# Altium PCB Test_project.PcbDoc
Units mil, origin at the board's own origin, x right, y up, seen from the top; angles counter-clockwise.
Board outline 1580 x 1930 mil, 2 copper layers (Top Layer, Bottom Layer), stack 61.756 mil thick; 15 components, 12 nets, 45 pads, 1 vias.
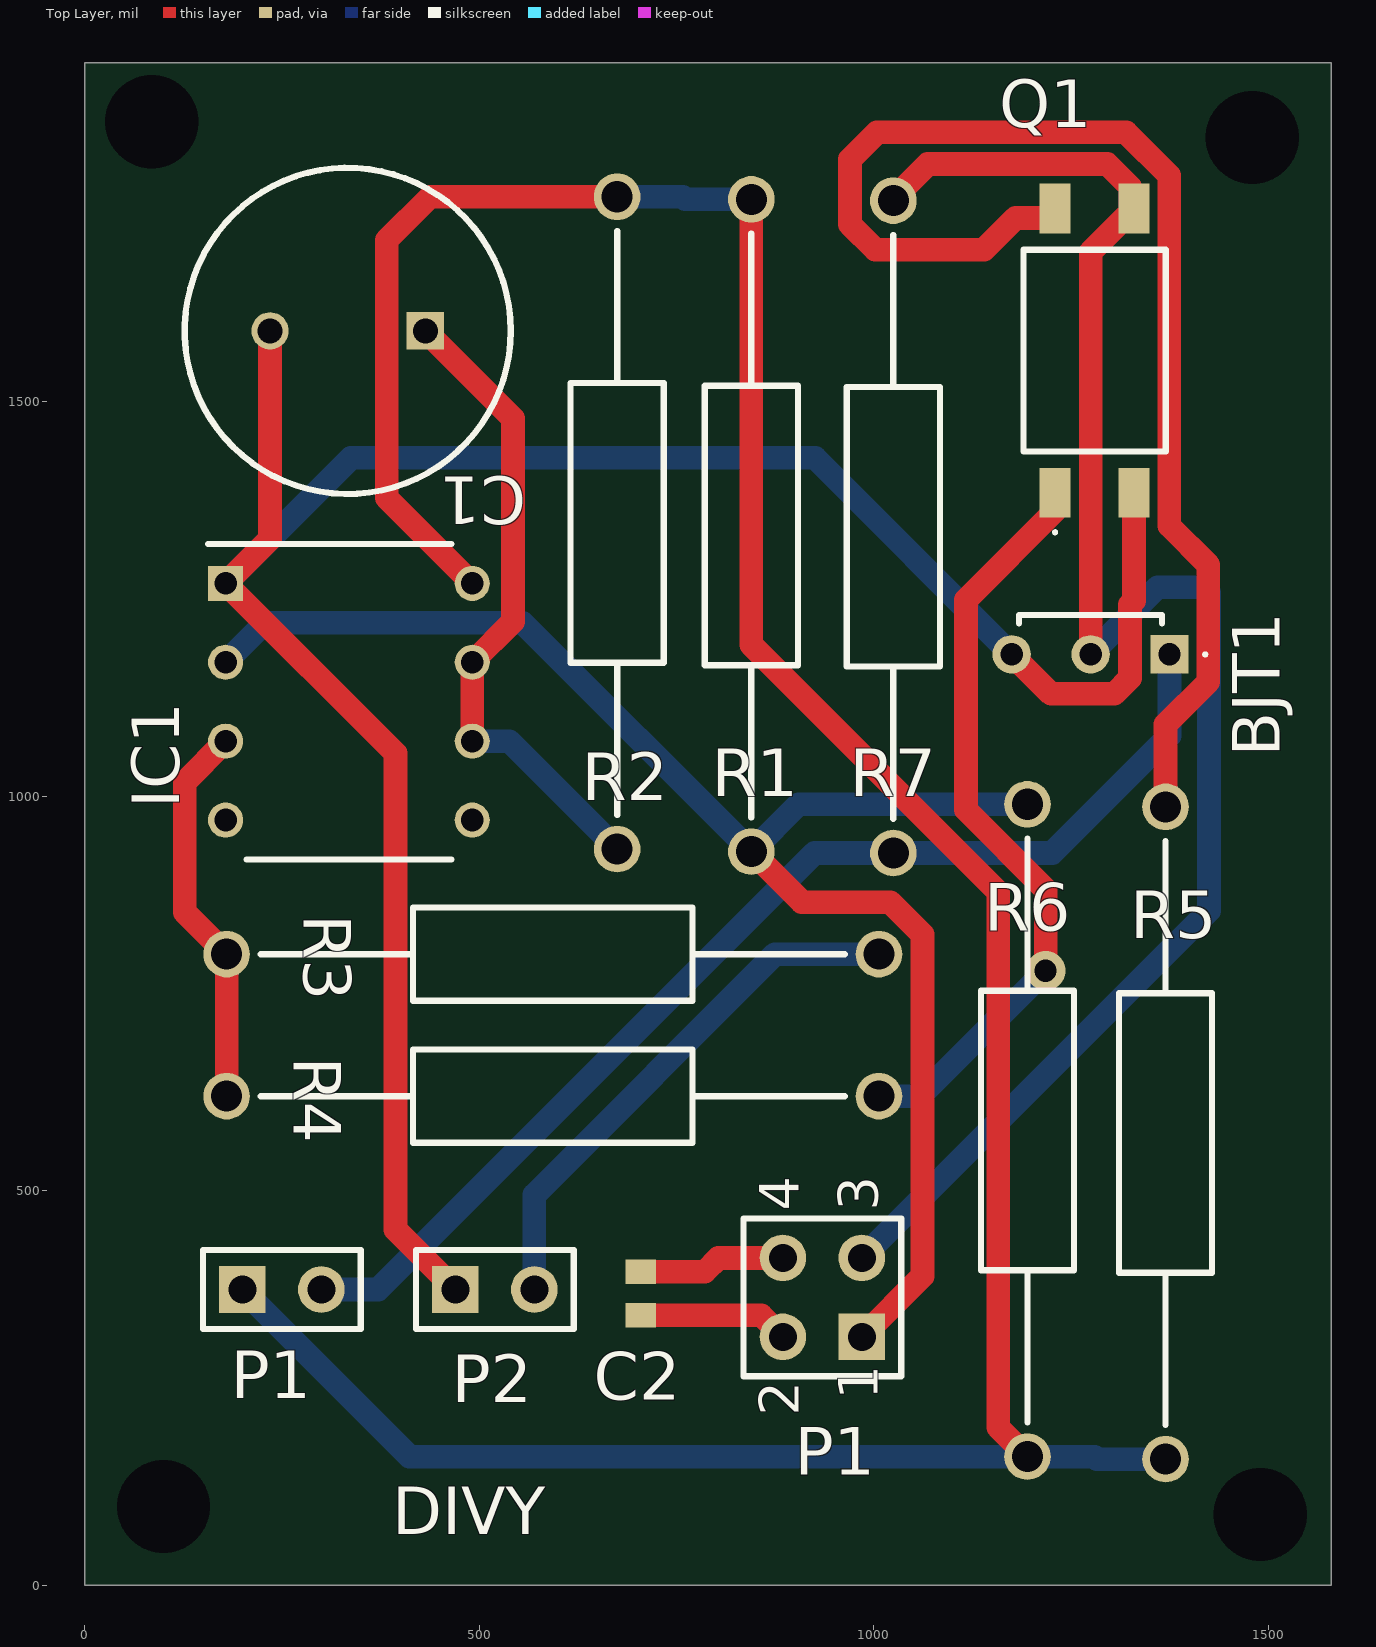
[diagram p0: Top Layer view]
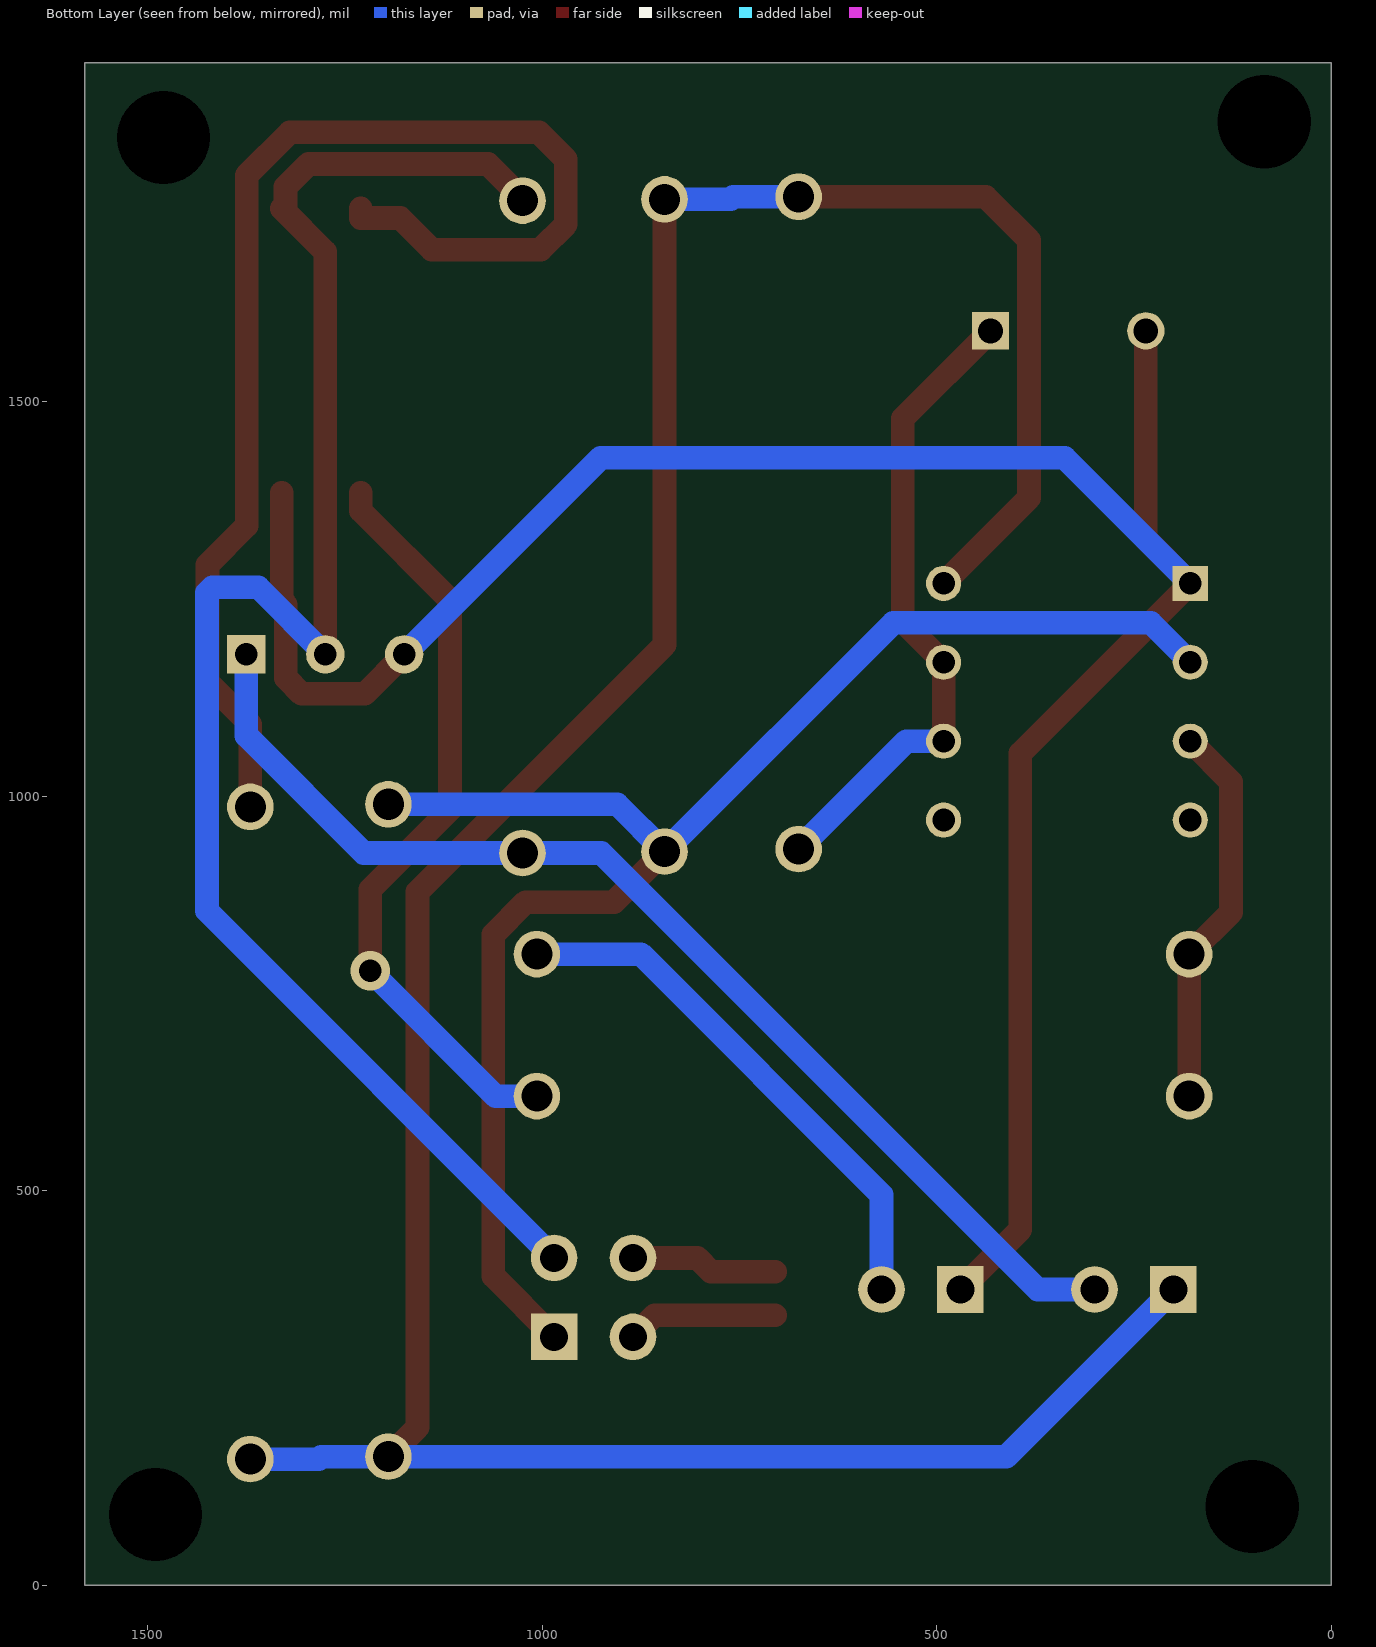
[diagram p1: Bottom Layer view, seen from below]
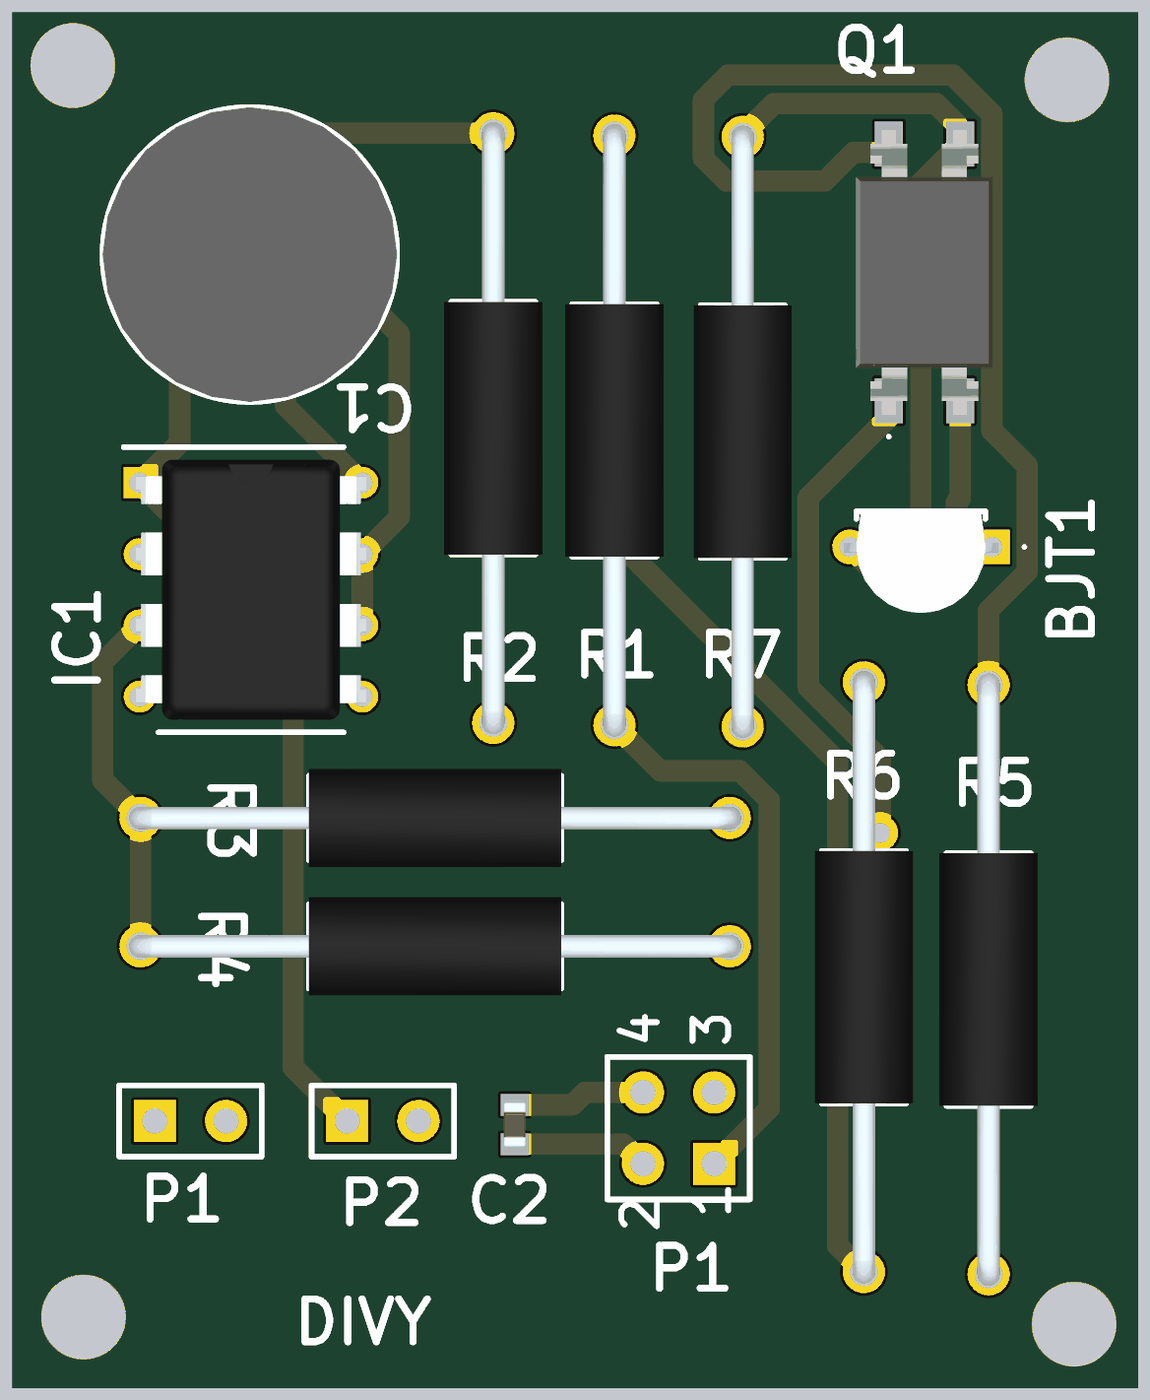
[diagram p2: 3D render of the assembled board from above, using the file's embedded part models]

## Layer stack, top to bottom
Top Solder: solder mask 1, SM-001, Dk 4
Top Layer: signal copper 1.378
Dielectric 1: core 59, Core-043, Dk 4.3
Bottom Layer: signal copper 1.378
Bottom Solder: solder mask 1, SM-001, Dk 4

## Board outline
0,0 0,1930 1580,1930 1580,0

## Design rules (kind name [scope] priority, off if disabled: settings)
Clearance [All] p1: gap=10 ignorepadtopadclearanceinfootprint=FALSE
PolygonConnect [All] p1: connectstyle=Relief reliefconductorwidth=10 reliefentries=4 polygonreliefangle="90 Angle" airgapwidth=10
RoutingVias [All] p1: holewidth=28 width=50 viastyle="Through Hole" minholewidth=28 minwidth=50 maxholewidth=28 maxwidth=50
SolderMaskExpansion [All] p1: expansion=4 istentingtop=FALSE
Width [All] p1: maxlimit=50 minlimit=10 preferedwidth=30
30 further rules are at their usual default settings.

## Components (designator, comment, footprint, x,y, rotation, side; value= is the part's Value field where it differs from the comment)
BJT1 "2N2222A" 2N2222A 1375,1180 r180 top
C1 "MAL214236102E3" CAPPRD500W60D1050H2200 431.85,1590 r180 top
C2 "KAM15AG81H100JT" CAPC1608X90N 705,370 r270 top
IC1 "NE555P" DIP794W53P254L959H508Q8N 335,1120 r0 top
P1 "Header 2X2" HDR2X2 985,315 r90 top
P1 "Header 2" HDR1X2 200,375 r0 top
P2 "Header 2" HDR1X2 470,375 r0 top
Q1 "APC-817C1-SL" APC817C1SL 1280,1565 r90 top
R1 "MOS1CT528A103J" RESAD2100W80L900D300 845,930 r90 top
R2 "MOS1CT528A103J" RESAD2100W80L900D300 675,933.23 r90 top
R3 "MOS1CT528A103J" RESAD2100W80L900D300 180,800 r0 top
R4 "MOS1CT528A103J" RESAD2100W80L900D300 180,620 r0 top
R5 "MOS1CT528A103J" RESAD2100W80L900D300 1370,986.77 r270 top
R6 "MOS1CT528A103J" RESAD2100W80L900D300 1195,163.23 r90 top
R7 "MOS1CT528A103J" RESAD2100W80L900D300 1025,928.23 r90 top

## Footprints (in the part's own frame and the unit in brackets; to place one, negate y for a bottom-side part, rotate by r counter-clockwise, add the part's x,y. Pads: shape width x height; smd on the part's side, far side on the other; paste and mask are expansions set on the pad)
2N2222A [mm]
  rect 1.234x1.234 hole 0.72: 1(0,0)
  round 1.234 hole 0.72: 2(2.54,0) 3(5.08,0)
  silkscreen extent -1.2,-1.27 4.84,0.05, body extent -0.2,-1.25 5.28,2.35, height 7.46
APC817C1SL [mm]
  rect 1.6x1 smd: 1(-4.575,1.27) 2(-4.575,-1.27) 3(4.575,-1.27) 4(4.575,1.27)
  silkscreen extent -5.9,-2.29 3.25,2.29, body extent -5.07,-2.44 5.07,2.44, height 3.6
CAPC1608X90N [mm]
  rect 0.78x0.99 smd: 1(-0.7,0) 2(0.7,0)
  body extent -0.8,-0.41 0.8,0.41, height 0.9
CAPPRD500W60D1050H2200 [mm]
  rect 1.2x1.2 hole 0.8: 1(0,0)
  round 1.2 hole 0.8: 2(5,0)
  silkscreen extent -2.75,-5.25 7.75,5.25, body extent -2.75,-5.24 7.75,5.24, height 22
DIP794W53P254L959H508Q8N [mm]
  rect 1.13x1.13 hole 0.73: 1(-3.97,3.81)
  round 1.13 hole 0.73: 2(-3.97,1.27) 3(-3.97,-1.27) 4(-3.97,-3.81) 5(3.97,-3.81) 6(3.97,-1.27) 7(3.97,1.27) 8(3.97,3.81)
  silkscreen extent -4.54,-5.08 3.3,5.08, body extent -4.1,-4.64 4.1,4.64, height 4.21
HDR1X2 [mm] "Connector; Header; 2 Position"
  rect 1.5x1.5 hole 0.9: 1(0,0)
  round 1.5 hole 0.9: 2(2.54,0)
  silkscreen extent -1.27,-1.27 3.81,1.27
HDR2X2 [mm] "Connector; Header; 2x2 Position"
  rect 1.5x1.5 hole 0.9: 1(0,0)
  round 1.5 hole 0.9: 2(0,2.54) 3(2.54,0) 4(2.54,2.54)
  silkscreen extent -1.27,-1.27 3.81,3.81
RESAD2100W80L900D300 [mm]
  round 1.5 hole 1: 1(0,0) 2(21,0)
  silkscreen extent 1.1,-1.5 19.9,1.5, body extent -0.4,-1.75 21.4,1.75, height 3.49

## Part data
BJT1: "Transistor BJT NPN", Manufacturer_Name=Diotec, Mouser Part Number=637-2N2222A, Arrow Part Number=2N2222A, Arrow Price/Stock=https://www.arrow.com/en/products/2n2222a/diotec-semiconductor-ag, Datasheet Link=https://diotec.com/request/datasheet/2n2222a.pdf, Height=7.5mm, Manufacturer_Part_Number=2N2222A, Mouser Price/Stock=https://www.mouser.co.uk/ProductDetail/Diotec-Semiconductor/2N2222A?qs=OlC7AqGiEDmNlRSTGL2dYg%3D%3D
C1: "Capacitor Polarised", Manufacturer_Name=Vishay, Mouser Part Number=594-MAL214236102E3, Datasheet Link=http://www.vishay.com/docs/28402/142rhs.pdf, Height=22mm, Manufacturer_Part_Number=MAL214236102E3, Mouser Price/Stock=https://www.mouser.co.uk/ProductDetail/Vishay-BC-Components/MAL214236102E3?qs=Ep9Lwju7gVqCnoasHklGbw%3D%3D
C2: "Capacitor", Manufacturer_Name="Kyocera AVX", Datasheet Link=https://datasheets.kyocera-avx.com/AutoMLCCKAM.pdf, Height=0.9mm, Manufacturer_Part_Number=KAM15AG81H100JT
IC1: "Integrated Circuit", Manufacturer_Name="Texas Instruments", Mouser Part Number=595-NE555P, Arrow Part Number=NE555P, Arrow Price/Stock=https://www.arrow.com/en/products/ne555p/texas-instruments?utm_currency=USD&region=europe, Datasheet Link=http://www.ti.com/lit/ds/symlink/ne555.pdf, Height=5.08mm, Manufacturer_Part_Number=NE555P, Mouser Price/Stock=https://www.mouser.co.uk/ProductDetail/Texas-Instruments/NE555P?qs=rkhjVJ6%2F3EIf4CWgjIKuKQ%3D%3D
P1: "Header, 2-Pin, Dual row", LatestRevisionDate=17-Jul-2002, LatestRevisionNote="Re-released for DXP Platform.", Publisher="Altium Limited"
P1 P2: "Header, 2-Pin", LatestRevisionDate=17-Jul-2002, LatestRevisionNote="Re-released for DXP Platform.", Publisher="Altium Limited"
Q1: "Phototransistor", Manufacturer_Name="American Bright LED", Mouser Part Number=442-APC817C1SL, Datasheet Link=https://www.americanbrightled.com/pdffiles/ir-uv/ir/APC-817.pdf, Height=3.8mm, Manufacturer_Part_Number=APC-817C1-SL, Mouser Price/Stock=https://www.mouser.co.uk/ProductDetail/American-Bright-LED/APC-817C1-SL?qs=Y0Uzf4wQF3lGQlk7OLeIsw%3D%3D
R1 R2 R3 R4 R5 R6 R7: "Resistor", Manufacturer_Name="KOA Speer", Mouser Part Number=660-MOS1CT528A103J, Datasheet Link=https://mouser.componentsearchengine.com/Datasheets/1/MOS1CT528A103J.pdf, Manufacturer_Part_Number=MOS1CT528A103J, Mouser Price/Stock=https://www.mouser.co.uk/ProductDetail/KOA-Speer/MOS1CT528A103J?qs=lc2O%252BfHJPVanf9VOC6Ilbg%3D%3D

## Free pads (board coordinates)
  round 60 hole 118.11: 5(1480,1835) 6(85,1855) 7(1490,90) 8(100,100)

## Via types
v1: diameter 50, hole 28, Top Layer to Bottom Layer, 1 vias

## Nets (pads, with @x,y where several pads share a name; then routed paths per layer and width w, separated by ;. In a path a pad name is that pad's centre, name@x,y a point inside that pad or via, vN(x,y) a via of type N, cw(c..) or ccw(c..) an arc to the next point about the centre after c; other vN are vias at no path point)
+: IC1.8 P1.1@200,375 R1.2 R2.2 R5.2 R6.1 | length 3963.6
  Top Layer w30: IC1.8 383,1378.3 383,1705 438,1760 R2.2 ; R1.2 845,1192 1158,879 1158,200.23 R6.1
  Bottom Layer w30: P1.1@200,375 411.77,163.23 R6.1 1280,163.23 1283.23,160 R5.2 ; R2.2 758,1760 761.23,1756.77 R1.2
-: BJT1.3 C1.2 IC1.1 P2.1 Q1.2 | length 2940.2
  Top Layer w30: C1.2 235,1326.3 IC1.1 394,1054.7 394,451 P2.1 ; BJT1.3 1225,1130 1305,1130 1325,1150 1325,1243 1330,1248 Q1.2
  Bottom Layer w30: IC1.1 337.7,1429 926,1429 BJT1.3
CLK_O/P: IC1.3 R3.1 R4.1 | length 493.4
  Top Layer w30: IC1.3 127,1018.3 127,853 R3.1 R4.1
GND: BJT1.1 P1.2@300,375 R7.1 | length 1468.8
  Bottom Layer w30: P1.2@300,375 372,375 925.23,928.23 R7.1 1226.23,928.23 1375,1077 BJT1.1
NetBJT1_2: BJT1.2 P1.3 Q1.3 R7.2 | length 2163.9
  Top Layer w30: R7.2 1025,1757.9 1068.72,1801.61 1296.13,1801.61 1325.31,1772.43 1325.31,1749.8 Q1.3 1275,1690.12 BJT1.2
  Bottom Layer w30: P1.3 1425,855 1425,1258 1418,1265 1360,1265 BJT1.2
NetC1_1: C1.1 IC1.6 IC1.7 R2.1 | length 827.8
  Top Layer w30: C1.1 543,1478.85 543,1221.7 IC1.7 IC1.6
  Bottom Layer w30: IC1.6 538.23,1070 R2.1
NetC2_1: C2.1 P1.4 | length 187.2
  Top Layer w30: C2.1 786,397.56 803.44,415 P1.4
NetC2_2: C2.2 P1.2@885,315 | length 191.4
  Top Layer w30: C2.2 857.56,342.44 P1.2@885,315
NetP2_2: P2.2 R3.2 | length 683.1
  Bottom Layer w30: P2.2 570,495 875,800 R3.2
NetQ1_1: Q1.1 R4.2 | length 971.6
  Top Layer w30: v1(1218,779) 1218,882 1117,983 1117,1249 1230,1362 Q1.1
  Bottom Layer w30: R4.2 1059,620 v1(1218,779)
NetQ1_4: Q1.4 R5.1 | length 1669.1
  Top Layer w30: Q1.4 1230,1733 1180,1733 1140,1693 1002,1693 970,1725 970,1807.43 1004.19,1841.61 1320.04,1841.61 1374.69,1786.97 1374.69,1342.96 1424.29,1293.36 1424.29,1145.35 1370,1091.06 R5.1
Operation: IC1.2 P1.1@985,315 R1.1 R6.2 | length 1984.4
  Top Layer w30: R1.1 909,866 1021,866 1062,825 1062,392 P1.1@985,315
  Bottom Layer w30: IC1.2 228.7,1220 555,1220 R1.1 905,990 R6.2
pads on no net: IC1.4 IC1.5

## Silkscreen, mask and mechanical layers (free items; w line width, h text height)
Top Overlay:
  text "DIVY" at 390,65 h60

## Text inside footprints (layer, text, board x,y; h text height)
P1: Top Overlay "1" at 1005,235 h50 r90; Top Overlay "2" at 905,215 h50 r90; Top Overlay "4" at 905,475 h50 r90; Top Overlay "3" at 1005,475 h50 r90